# Altium PCB ir_probe.PcbDoc
Units mm, origin at the board's own origin, x right, y up, seen from the top; angles counter-clockwise.
Board outline 30 x 23.76 mm, 2 copper layers (Top Layer, Bottom Layer), stack 1.571 mm thick; 19 components, 17 nets, 72 pads, 11 vias.
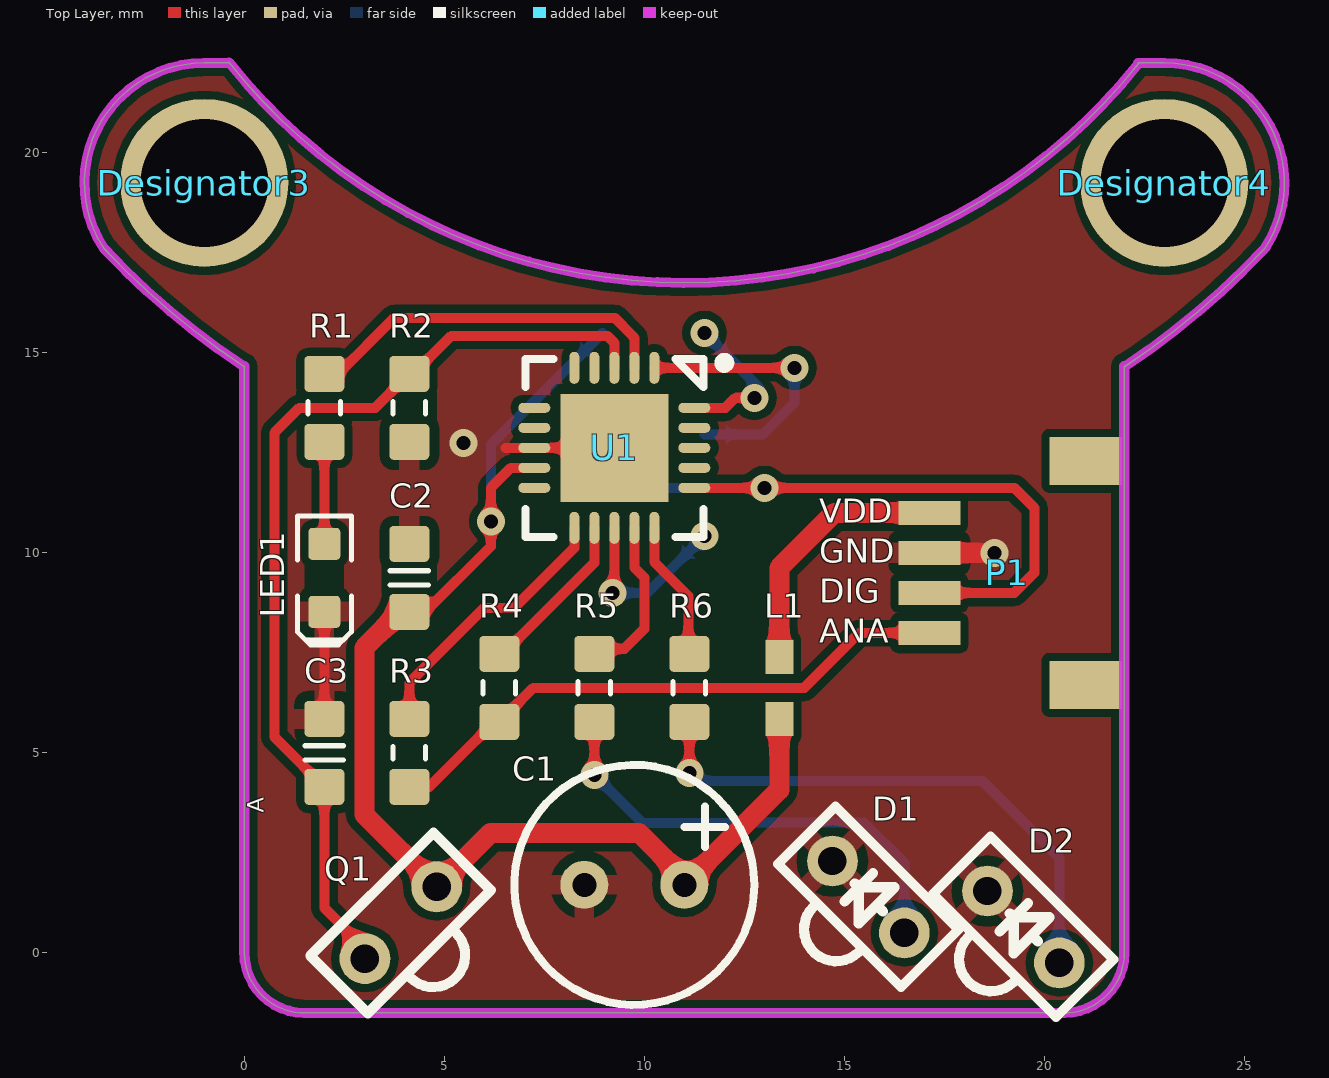
[diagram p0: Top Layer view]
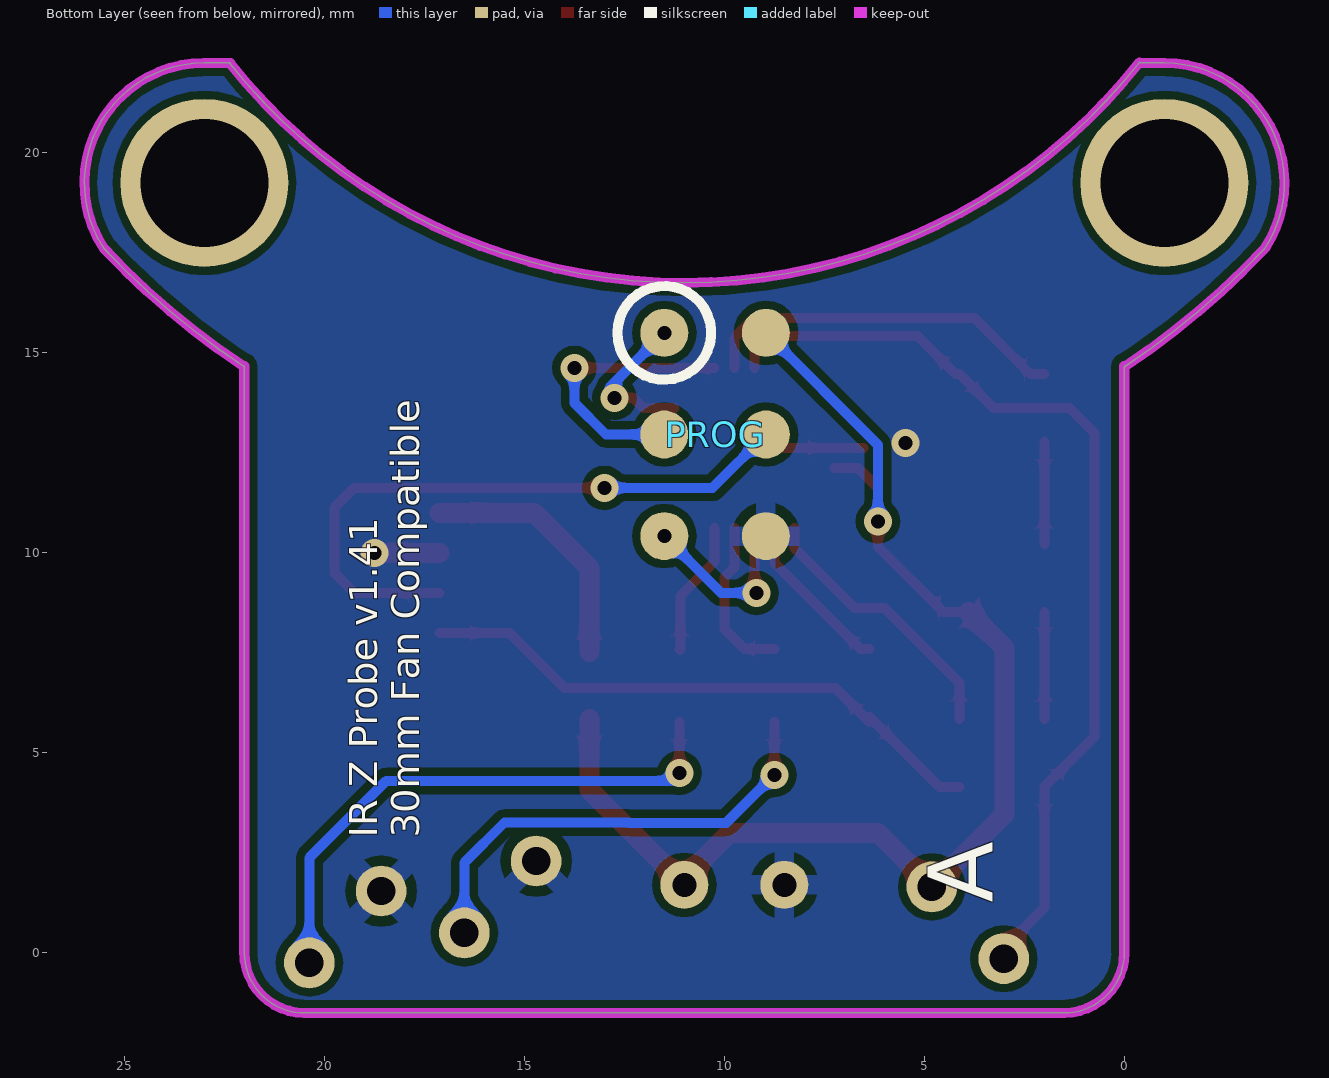
[diagram p1: Bottom Layer view, seen from below]
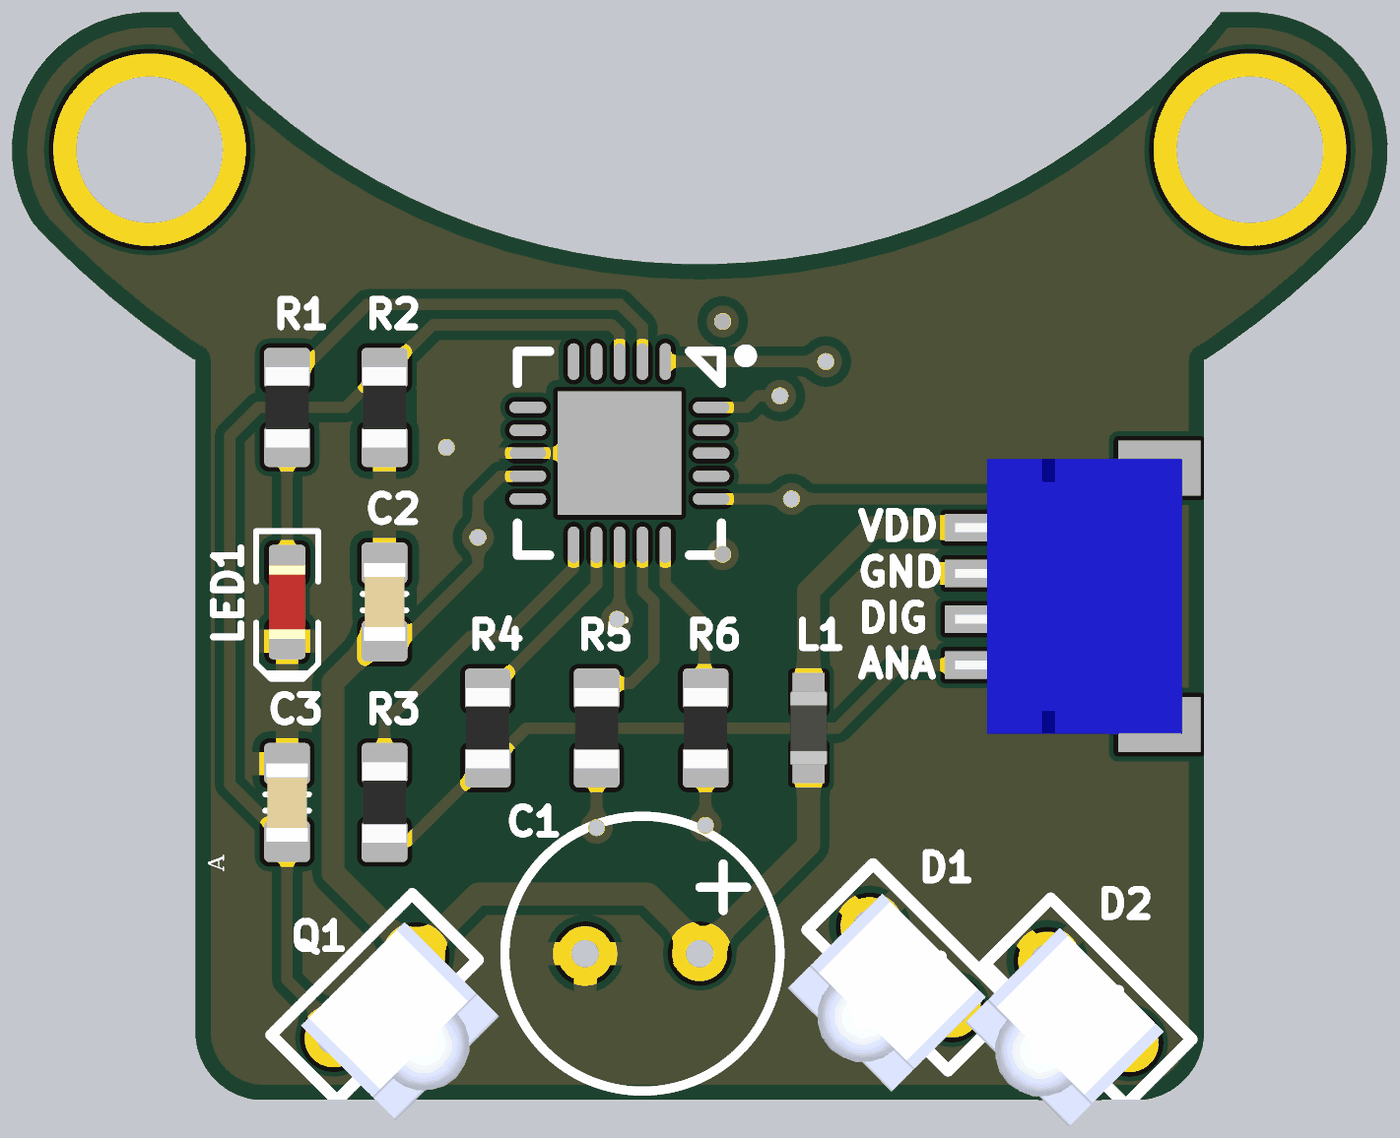
[diagram p2: 3D render of the assembled board from above, using the file's embedded part models]

## Layer stack, top to bottom
Top Solder: solder mask 0.0102, Solder Resist, Dk 3.5
Top Layer: signal copper 0.0356
Dielectric1: dielectric 1.5, FR-4, Dk 4.8
Bottom Layer: signal copper 0.0356
Bottom Solder: solder mask 0.0102, Solder Resist, Dk 3.5

## Board outline
-3.515,17.616 ccw(c11,31.25) -0.023,14.665 0,14.665 0,0 ccw(c1.5,0) 1.5,-1.5 20.5,-1.5 ccw(c20.5,0) 22,0 22,14.665 22.023,14.665 ccw(c11,31.25) 25.515,17.616 25.516,17.616 ccw(c23,19.25) 23,22.25 22.349,22.25 22.361,22.241 cw(c11,31.25) -0.379,22.263 -0.396,22.25 -1,22.25 ccw(c-1,19.25)

## Design rules (kind name [scope] priority, off if disabled: settings)
Clearance [All] p1: gap=0.2 ignorepadtopadclearanceinfootprint=FALSE except(0: Arc-Hole Track-Hole SMDPad-Hole THPad-Hole Via-Hole Fill-Hole Poly-Hole Region-Hole Text-Hole)
FabricationTestPointUsage TestPointUsage [All] p1: valid=0 allowmultiple=FALSE
FabricationTestpoint Testpoint [All] p1: side=3 testpointundercomponent=TRUE minsize=1.016 maxsize=2.54 preferedsize=1.524 minholesize=0 maxholesize=1.016 preferedholesize=0.813 testpointgrid=0.025 allowsidetop=TRUE allowsidebottom=TRUE usegrid=TRUE gridtolerance=0
HoleSize [All] p1: absolutevalues=TRUE maxlimit=4 minlimit=0.025 maxpercent=80.000 minpercent=20.000
PolygonConnect [IsVia] p1: connectstyle=Direct reliefconductorwidth=0.5 reliefentries=4 polygonreliefangle="90 Angle" airgapwidth=0.25
PolygonConnect PolygonConnect_1 [All] p2: connectstyle=Relief reliefconductorwidth=0.5 reliefentries=4 polygonreliefangle="90 Angle" airgapwidth=0.25
RoutingVias [All] p1: holewidth=0.35 width=0.6 viastyle="Through Hole" minholewidth=0.35 minwidth=0.6 maxholewidth=0.8 maxwidth=1
SilkToSolderMaskClearance SilkscreenOverComponentPads [IsPad] p1: minsilkscreentomaskgap=0.254 clearancetoexposedcopper=TRUE
SolderMaskExpansion [All] p1: expansion=0.102
Width Width_Power [(InNet('5V') OR InNet('GND') OR InNet('VCC'))] p1: maxlimit=1 minlimit=0.25 preferedwidth=0.25 minimp=50.000000 maximp=50.000000 favimp=50.000000
Width [All] p2: maxlimit=0.25 minlimit=0.2 preferedwidth=0.25 minimp=50.000000 maximp=50.000000 favimp=50.000000
26 further rules are at their usual default settings.

## Classes and differential pairs
component class z-probe: C1 C2 C3 D1 D2 L1 LED1 P1 PROG Q1 R1 R2 R3 R4 R5 R6 U1

## Components (designator, comment, footprint, x,y, rotation, side; value= is the part's Value field where it differs from the comment)
C1 "CAPE 100uF 16V THT" 6-DIA-CAP 8.5,1.7 r0 top locked
C2 "approved sub OK" CAPC1608X90N 4.125,9.375 r270 top value=100n
C3 "approved sub OK" CAPC1608X90N 2,5 r90 top value=1n
D1 "GL480E" LED-2.54SPACING 16.5,0.5 r135 top locked
D2 "GL480E" LED-2.54SPACING 20.375,-0.25 r135 top locked
Designator3 "Comment" M3-Hole -1,19.25 r0 top
Designator4 "Comment" M3-Hole 23,19.25 r270 top
L1 "7447965" SMD-0603 13.375,6.625 r270 top
LED1 "Red" LED-0603-RED 2,9.375 r270 top
P1 "JST-SH 4P" SM04B-SRSS-TB 17.125,11 r0 top
PROG "ISP" "ICSP Pads" 11.5,15.5 r180 bottom
Q1 "SFH3100F" SFH3100F-FOOTPRINT 4.81,1.65 r225 top locked
R1 "Thick Film" RESC1608X55N 2,13.625 r270 top value=330R
R2 "Thick Film" RESC1608X55N 4.125,13.625 r90 top value=6K8
R3 "Thick Film" RESC1608X55N 4.125,5 r270 top value=10K
R4 "Thick Film" RESC1608X55N 6.375,6.625 r270 top value=12K
R5 "Thick Film" RESC1608X55N 8.75,6.625 r90 top value=150R
R6 "Thick Film" RESC1608X55N 11.125,6.625 r90 top value=130R
U1 "ATtiny44A-MU" 20M1_N 9.25,12.625 r270 top

## Footprints (in the part's own frame and the unit in brackets; to place one, negate y for a bottom-side part, rotate by r counter-clockwise, add the part's x,y. Pads: shape width x height; smd on the part's side, far side on the other; paste and mask are expansions set on the pad)
6-DIA-CAP [mm]
  round 1.2 hole 0.6: 0(0,0) 1(2.5,0)
  silkscreen extent -1.75,-3 4.25,3, body extent -1.75,-3 4.25,3, height 7
20M1_N [mm] "QFN, 20-Leads, Body 4x4mm, Pitch 0.5mm, Thermal Pad 2.7x2.7mm, IPC Medium Density"
  oval 0.8x0.25 smd: 1(-2,1) 2(-2,0.5) 3(-2,0) 4(-2,-0.5) 5(-2,-1) 11(2,-1) 12(2,-0.5) 13(2,0) 14(2,0.5) 15(2,1)
  oval 0.25x0.8 smd: 6(-1,-2) 7(-0.5,-2) 8(0,-2) 9(0.5,-2) 10(1,-2) 16(1,2) 17(0.5,2) 18(0,2) 19(-0.5,2) 20(-1,2)
  rect 2.7x2.7 smd: 21(0,0)
  silkscreen extent -2.25,-2.22 2.23,2.88, body extent -2.07,-2.07 2.08,2.08, height 0.8
CAPC1608X90N [mm] "Chip Capacitor, Body 1.6x0.8mm, EIA 0603, IPC Medium Density"
  round 0.254 on Mech15: 0(0,0)
  rrect25% 0.9x1 smd: 1(-0.85,0) 2(0.85,0)
  Top Layer pour cut-out: -0.6,0.5 -0.4,0.7 0.4,0.7 0.6,0.5 0.6,-0.5 0.4,-0.7 -0.4,-0.7 -0.6,-0.5
  silkscreen extent -0.18,-0.48 0.18,0.48, body extent -0.85,-0.45 0.85,0.45, height 0.89
"ICSP Pads" [mm]
  round 1.2 smd mask+0: 0(0,0)
  round 1.2 smd: 1(2.54,0) 2(0,-2.54) 3(2.54,-2.54) 4(0,-5.08) 5(2.54,-5.08)
  silkscreen extent -1.17,-1.17 1.17,1.17
LED-2.54SPACING [mil]
  round 50 hole 28: 1(100,0) 2(0,0)
  silkscreen extent -35,-40 136,76, body extent -14,-28 112,98, height 215
LED-0603-RED [mm]
  round 0.254 on Mech15: 0(0,0)
  rrect25% 0.8x0.8 smd: A(-0.85,0) K(0.85,0)
  Top Layer pour cut-out: -0.5,0.5 0.5,0.5 0.5,-0.5 -0.5,-0.5
  silkscreen extent -1.55,-0.67 1.68,0.67, body extent -0.8,-0.4 0.8,0.4, height 0.75
M3-Hole [mm]
  round 4.2 hole 3.2: M3(0,0)
RESC1608X55N [mm] "Chip Resistor, Body 1.6x0.8mm, EIA 0603, IPC Medium Density"
  round 0.254 on Mech15: 0(0,0)
  rrect25% 0.9x1 smd: 1(-0.85,0) 2(0.85,0)
  Top Layer pour cut-out: -0.6,0.5 -0.4,0.7 0.4,0.7 0.6,0.5 0.6,-0.5 0.4,-0.7 -0.4,-0.7 -0.6,-0.5
  silkscreen extent -0.15,-0.41 0.15,0.41, body extent -0.87,-0.47 0.88,0.48, height 0.54
SFH3100F-FOOTPRINT [mil]
  round 50 hole 28: 1(0,0) 2(100,0)
  silkscreen extent -35,-40 136,76, body extent -14,-28 112,98, height 215
SM04B-SRSS-TB [mm]
  rect 1.55x0.6 smd: 0(0,0) 1(0,-1) 2(0,-2) 3(0,-3)
  rect 1.8x1.2 smd: ""(3.9,-4.3) ""(3.9,1.3)
  body extent -0.55,-4.5 4.4,1.5, height 2.96
SMD-0603 [mm] "Chip Inductor, 2-Leads, Body 1.6x0.8mm"
  rect 0.85x0.7 smd: 1(-0.775,0) 2(0.775,0)
  body extent -0.8,-0.4 0.8,0.4, height 0.95

## Part data
C1: Supplier Part Number 1=399-6648-1-ND, Supplier 1=Digi-Key
C2: library part CAPC_100n_0603_X7R_50V_10%, "Capacitor SMD Cer 100nF 10% 50V X7R 0603", Manufacturer 1="AVX Corporation", Manufacturer 2="TDK Corporation", Manufacturer Part Number 1=06035C104KAT2A, Manufacturer Part Number 2=C1608X7R1H104K, Package / Case="0603 (1608 Metric)", Ratings="50V; X7R", Supplier Part Number 1=478-5052-1-ND, Tolerance=±10%, ComponentLink1Description=http://www.avx.com/docs/Catalogs/cx7r.pdf, ComponentLink1URL=http://www.avx.com/docs/Catalogs/cx7r.pdf, ComponentLink2Description=http://product.tdk.com/capacitor/mlcc/en/documents/mlcc_commercial_general_en.pdf, ComponentLink2URL=http://product.tdk.com/capacitor/mlcc/en/documents/mlcc_commercial_general_en.pdf, Material=ceramic, SCDType=spec, Supplier 1=Digi-Key, Supplier 2=Digi-Key, Supplier Part Number 2=445-1314-1-ND
C3: library part CAPC_1n_0603_X7R_100V_10%, "Capacitor SMD Cer 1nF 10% 100V X7R 0603", Manufacturer 1="Murata Electronics North America", Manufacturer Part Number 1=GCM188R72A102KA37D, Operating Temperature="-55°C ~ 125°C", Package / Case="0603 (1608 metric)", Ratings="100V; X7R", Supplier Part Number 1=490-4780-1-ND, Tolerance=±10%, ComponentLink1Description=http://search.murata.co.jp/Ceramy/image/img/PDF/ENG/GCM188R72A102KA37.pdf, ComponentLink1URL=http://search.murata.co.jp/Ceramy/image/img/PDF/ENG/GCM188R72A102KA37.pdf, Material=ceramic, SCDType=spec, Size / Dimension="0.063\" L x 0.031\" W (1.60mm x 0.80mm)", Supplier 1=Digi-Key, Thickness (Max)="0.035\" (0.90mm)"
D1 D2: Supplier Part Number 1=425-1940-5-ND, Supplier 1=Digi-Key
L1: "SMD-Multilayer Inductor WE-MI, L = 1.00 µH", Inductance="1.00 µH", Supplier Part Number 1=445-3163-2-ND, ComponentLink1Description="Manufacturer URL", ComponentLink1URL=http://www.we-online.com, ComponentLink2Description=Datasheet, ComponentLink2URL=http://www.we-online.de/katalog/media/pdf/7447965.pdf, DatasheetVersion="ver 5, Oct-2004", PackageDescription="Chip Inductor, 2-Leads, Body 1.6 x 0.8 mm", PackageReference=SMD-0603, PackageVersion=2009, Supplier 1=Digi-Key
LED1: library part LED_SMD_Red_0603_220mcd, "LED 0603 SMD Hyper Red 630nm 220mcd 20mA", Manufacturer 1="Kingbright Company LLC", Manufacturer Part Number 1=APT1608SURCK, Package / Case="0603 (1608 metric)", Ratings="220 mcd; 630 nm", Supplier Part Number 1=754-1123-1-ND, Voltage - Forward (Vf) @ 10mA=1.9V, Voltage - Forward (Vf) Typ=1.95V, ComponentLink1Description=http://www.us.kingbright.com/images/catalog/SPEC/APT1608SURCK.pdf, ComponentLink1URL=http://www.us.kingbright.com/images/catalog/SPEC/APT1608SURCK.pdf, Material="AlGaInP on GaAs", SCDType=source, Supplier 1=Digi-Key
P1: library part SM04B-SRSS-TB, Supplier Part Number 1=455-1804-1-ND, Supplier 1=Digi-Key
PROG: library part "ISP Header"
Q1: Supplier Part Number 1=475-1445-ND, Supplier 1=Digi-Key
R1: library part RES_330R_0603_5%, "Resistor SMD chip 330 Ohm 0.1W 5% 0603", Manufacturer 1="Vishay Dale", Manufacturer 2=Yageo, Manufacturer Part Number 1=CRCW0603330RJNEA, Manufacturer Part Number 2=RC0603JR-07330RL, Package / Case="0603 (1608 metric)", Ratings="1/10 W", Supplier Part Number 1=541-330GCT-ND, Tolerance=±5%, ComponentLink1Description=http://www.vishay.com/doc?20035, ComponentLink1URL=http://www.vishay.com/doc?20035, ComponentLink2Description=http://www.yageo.com/documents/recent/PYu-RC0603_51_RoHS_L_4.pdf, ComponentLink2URL=http://www.yageo.com/documents/recent/PYu-RC0603_51_RoHS_L_4.pdf, Material="Thick Film", SCDType=spec, Supplier=http://au.rs-online.com/web/p/surface-mount-fixed-resistors/6790226/, Supplier 1=Digi-Key, Supplier 2=Digi-Key, Supplier Part Number 2=311-330GRCT-ND
R2 R5 R6: library part RES_2K2_0603_5%, "Resistor SMD chip 2.2k Ohm 0.1W 5% 0603", Manufacturer 1=Yageo, Manufacturer 2="Samsung Electro-Mechanics America, Inc", Manufacturer 3="Stackpole Electronics Inc", Manufacturer 4="Rohm Semiconductor", Manufacturer 5="Panasonic Electronic Components", Manufacturer Part Number 1=RC0603JR-072K2L, Manufacturer Part Number 2=RC1608J222CS, Manufacturer Part Number 3=RMCF0603JT2K20, Manufacturer Part Number 4=MCR03ERTJ222, Manufacturer Part Number 5=ERJ-3GEYJ222V, Package / Case="0603 (1608 metric)", Ratings="1/10 W", Supplier Part Number 1=311-2.2KGRDKR-ND, Temperature Coefficient=±100ppm/°C, Tolerance=±5%, ComponentLink1Description=http://www.yageo.com/documents/recent/PYu-RC0603_51_RoHS_L_4.pdf, ComponentLink1URL=http://www.yageo.com/documents/recent/PYu-RC0603_51_RoHS_L_4.pdf, ComponentLink2Description=http://www.samsungsem.com/servlet/FileDownload?filename=productcatalog/pdf/Chip_Resistor.pdf, ComponentLink2URL=http://www.samsungsem.com/servlet/FileDownload?filename=productcatalog/pdf/Chip_Resistor.pdf, ComponentLink3Description=http://www.seielect.com/Catalog/SEI-RMCF_RMCP.pdf, ComponentLink3URL=http://www.seielect.com/Catalog/SEI-RMCF_RMCP.pdf, ComponentLink4Description=http://rohmfs.rohm.com/en/products/databook/datasheet/passive/resistor/chip_resistor/mcr_g.pdf, ComponentLink4URL=http://rohmfs.rohm.com/en/products/databook/datasheet/passive/resistor/chip_resistor/mcr_g.pdf, ComponentLink5Description=http://industrial.panasonic.com/www-cgi/jvcr13pz.cgi?E+PZ+3+AOA0001+ERJ3GEYJ222V+7+WW, ComponentLink5URL=http://industrial.panasonic.com/www-cgi/jvcr13pz.cgi?E+PZ+3+AOA0001+ERJ3GEYJ222V+7+WW, Material="Thick Film", RoHS 1="RoHS Compliant", RoHS 2="RoHS Compliant", RoHS 3="RoHS Compliant", RoHS 4="RoHS Compliant", RoHS 5="RoHS Compliant", SCDType=spec, Supplier 1=Digi-Key, Supplier 2=Digi-Key, Supplier 3=Digi-Key, Supplier 4=Digi-Key, Supplier 5=Digi-Key, Supplier Part Number 2=1276-5070-6-ND, Supplier Part Number 3=RMCF0603JT2K20DKR-ND, Supplier Part Number 4=RHM2.2KCGDKR-ND, Supplier Part Number 5=P2.2KGDKR-ND
  R2: Supplier=http://au.rs-online.com/web/p/surface-mount-fixed-resistors/8102303/
  R5: Supplier=http://au.rs-online.com/web/p/surface-mount-fixed-resistors/6789784/
  R6: Supplier=http://au.rs-online.com/web/p/surface-mount-fixed-resistors/8102129/
R3 R4: library part RES_10K_0603_1%, "Resistor SMD chip 10k Ohm 0.1W 1% 0603", Manufacturer 1=Yageo, Manufacturer Part Number 1=RC0603FR-0710KL, Package / Case="0603 (1608 Metric)", Ratings=1/10W, Supplier Part Number 1=311-10.0KHRCT-ND, Tolerance=±1%, SCDType=spec, Supplier 1=Digi-Key
U1: "8-bit AVR Microcontroller,  20MHz, 1.8-5.5V, 4KB Flash, 256 Bytes EEPROM, 256 Bytes SRAM, 20-pin MLF, Industrial Grade (-40°C to 85°C), Pb-Free", Supplier Part Number 1=ATTINY44A-MU-ND, Code_JEDEC=MO-220WGGD-5, ComponentLink1Description="Manufacturer URL", ComponentLink1URL=http://www.atmel.com/, ComponentLink2Description="ATtiny24A/44A/84A Datasheet", ComponentLink2URL=http://www.atmel.com/dyn/resources/prod_documents/doc8183.pdf, ComponentLink3Description="ATtiny24A/44A/84A Summary", ComponentLink3URL=http://www.atmel.com/dyn/resources/prod_documents/8183S.pdf, DatasheetVersion="revD, Apr-2011", PackageDescription="20-pad, 4 x 4 x 0.8 mm Body, Lead Pitch 0.50 mm, 2.6 mm Exposed Pad, Micro Lead Frame Package (MLF)", PackageReference=20M1, PackageVersion="revA, Oct-2004", Supplier 1=Digi-Key

## Via types
v1: diameter 0.7, hole 0.35, Top Layer to Bottom Layer, tented both sides, 9 vias
v2: diameter 0.7, hole 0.35, Top Layer to Bottom Layer, tented top, 2 vias

## Nets (pads, with @x,y where several pads share a name; then routed paths per layer and width w, separated by ;. In a path a pad name is that pad's centre, name@x,y a point inside that pad or via, vN(x,y) a via of type N, cw(c..) or ccw(c..) an arc to the next point about the centre after c; other vN are vias at no path point)
5V: C1.1 C2.2 L1.2 PROG.1 Q1.1 U1.9 | length 32.5
  Top Layer w0.25: C2.2@3.9,8.525 C2.2 4.525,8.525 6.161,10.161 v1(6.161,10.786) 6.161,11.625 6.661,12.125 U1.9 ; C1.1@10.55,1.5 10.9,1.85 C1.1@10.9,1.966 ; L1.2 L1.2@13.375,5.975
  Top Layer w0.5: C2.2@3.9,8.525 3,7.625 3,3.46 Q1.1 6.16,3 9.866,3 C1.1@10.9,1.966 ; C1.1 13.375,4.075 L1.2
  Bottom Layer w0.25: v1(6.161,10.786) 6.161,12.701 PROG.1
DIODE1: R5.2 U1.14 | length 4.1
  Top Layer w0.25: R5.2@8.75,7.6 9.5,7.6 10,8.1 10,9.384 9.75,9.634 U1.14
DIODE2: R6.2 U1.15 | length 3.4
  Top Layer w0.25: U1.15 10.25,9.77 11.1,8.92 11.1,7.575 R6.2@11.125,7.6
GND: C1.0 C2.1 C3.2 D1.1 D2.1 LED1.K P1.1 PROG.5 R2.1 U1.8 U1.21 | length 7
  Top Layer w0.25: C3.2 LED1.K ; 6.525,12.625 U1.8 U1.21
  Top Layer w0.5: P1.1 v1(18.75,10)
  other v1: 5.475,12.75
INDICATOR: R1.1 U1.2 | length 9.3
  Top Layer w0.25: R1.1 2.35,14.475 3.75,15.875 9.261,15.875 9.7,15.436 9.7,15.425 9.75,15.375 U1.2
MISO: PROG.0 U1.20 | length 3.8
  Top Layer w0.25: U1.20 12.025,13.625 12.275,13.875 v1(12.75,13.875)
  Bottom Layer w0.25: v2(11.5,15.5) 12.875,14.125 12.875,14 v1(12.75,13.875)
MOSI: P1.2 PROG.3 U1.16 | length 17.8
  Top Layer w0.25: U1.16 19.25,11.625 19.75,11.125 19.75,9.5 19.25,9 P1.2
  Bottom Layer w0.25: PROG.3 10.295,11.625 v1(13,11.625)
NetD1_2: D1.2 R5.1 | length 11.7
  Top Layer w0.25: v1(8.75,4.45) R5.1
  Bottom Layer w0.25: v1(8.75,4.45) 9.95,3.25 12.384,3.25 12.39,3.256 15.494,3.256 16.5,2.25 D1.2
NetD2_2: D2.2 R6.1 | length 14
  Top Layer w0.25: v1(11.125,4.5) R6.1
  Bottom Layer w0.25: v1(11.125,4.5) 11.325,4.3 18.45,4.3 20.375,2.375 D2.2
NetLED1_A: LED1.A R1.2 | length 2.5
  Top Layer w0.25: LED1.A R1.2
RESET: PROG.4 U1.13 | length 4.5
  Top Layer w0.25: v1@9.25,9 U1.13
  Bottom Layer w0.25: v1(9.2,9) 10.08,9 v2(11.5,10.42)
SCK: PROG.2 U1.1 | length 7
  Top Layer w0.25: U1.1 v1(13.75,14.625)
  Bottom Layer w0.25: PROG.2 12.96,12.96 13.75,13.75 v1(13.75,14.625)
SIG_A: P1.3 R3.2 R4.2 | length 14.6
  Top Layer w0.25: R3.2 4.625,4.15 R4.2@6.375,5.9 ; R4.2 7.225,6.625 14,6.625 15.375,8 P1.3
SIG_A1: R3.1 U1.11 | length 6.9
  Top Layer w0.25: R3.1 4.125,6.75 6,8.625 6.75,8.625 8.25,10.125 U1.11
SIG_A2: R4.1 U1.12 | length 4.1
  Top Layer w0.25: R4.1@6.375,7.6 6.6,7.6 8.75,9.75 U1.12
TRANSISTOR: C3.1 Q1.2 R2.2 U1.3 | length 24.3
  Top Layer w0.25: Q1.2 3.014,0.111 2,1.125 C3.1 0.75,5.4 0.75,13 1.375,13.625 3.275,13.625 R2.2 4.225,14.475 5.175,15.425 9.075,15.425 9.25,15.25 U1.3
VCC: L1.1 P1.0 | length 6.4
  Top Layer w0.5: L1.1@13.375,7.525 13.375,9.625 14.75,11 P1.0
pads on no net: C2.0 C3.0 Designator3.M3 Designator4.M3 LED1.0 P1. R1.0 R2.0 R3.0 R4.0 R5.0 R6.0 U1.4 U1.5 U1.6 U1.7 U1.10 U1.17 U1.18 U1.19

## Polygon pours and split planes (outlines as drawn)
GND on Bottom Layer "GND" (solid, remove dead copper, pour order 0): -4,22.5 -4,-2.5 26,-2.5 26,22.5
GND on Top Layer "GND" (solid, remove dead copper, pour order 2): -4,22.5 -4,-2.5 26,-2.5 26,22.5

## Keep-outs
Keep-Out Layer:
  lines w0.25: -3.516,17.616 cw(c-1,19.25) -1,22.25 ; -3.515,17.616 ccw(c11,31.25) -0.023,14.665 ; -0.379,22.263 ccw(c11,31.25) 22.361,22.241 ; 22.023,14.665 ccw(c11,31.25) 25.515,17.616 ccw(c23,19.25) 23,22.25
  lines w0.254: -1,22.25 -0.396,22.25 ; 0,14.665 0,0 ccw(c1.5,0) 1.5,-1.5 20.5,-1.5 ccw(c20.5,0) 22,0 22,14.665 ; 22.349,22.25 23,22.25

## Silkscreen, mask and mechanical layers (free items; w line width, h text height)
Top Overlay:
  lines w0.2: 10.775,14.85 11.475,14.15
  text "VDD" at 14.375,10.75 h0.6
  text "GND" at 14.375,9.75 h0.6
  text "DIG" at 14.375,8.75 h0.6
  text "ANA" at 14.375,7.75 h0.6
  text "A" at 0.625,3.5 h0.7 r90
Bottom Overlay:
  text "IR Z Probe v1.41 / 30mm Fan Compatible" at 17.625,2.875 h0.7 r270
  text "A" at 2.75,1.25 h2.8 r270
Mechanical 2:
  lines w0.013: -144.074,-93.324 -141.066,-93.324 -139.129,-87.836 -142.137,-87.836 -144.074,-93.324 ; -138.263,-93.324 -135.256,-93.324 -133.319,-87.836 -136.327,-87.836 -138.263,-93.324 ; -132.453,-93.324 -129.446,-93.324 -127.509,-87.836 -130.516,-87.836 -132.453,-93.324 ; -126.643,-93.324 -123.635,-93.324 -121.699,-87.836 -124.706,-87.836 -126.643,-93.324 ; -121.026,-93.324 -118.018,-93.324 -116.081,-87.836 -119.089,-87.836 -121.026,-93.324 ; -115.215,-93.324 -112.208,-93.324 -110.271,-87.836 -113.279,-87.836 -115.215,-93.324 ; -109.405,-93.324 -106.397,-93.324 -104.461,-87.836 -107.468,-87.836 -109.405,-93.324
Mechanical 4:
  circle w0.25: c11,31.25 r14.5
  lines w0.254: -4,19 -4,19.375 ; 26,19.2 26,19.25
  text "X" at 29.9,-1.4 h1.52 r180
Mechanical 7:
  lines w0.2: 9.4,-1.8 10.5,-2.9 11.5,-2.9 12.6,-1.8
  text "Nozzle" at 3.8,-3 h1
  text "Distance from board edge to nozzle (X)  / should be 1.00 - 2.00mm /  / Vertical distance from mounting holes / to nozzle tip should be 20.75 + X / (i.e. 21.75 to 22.75)" at -9.2,-17.6 h1
Mechanical 16:
  drawing of 1875 lines, arcs and shapes, not listed
  text "1" at -102.129,101.361 h0.6
  text "2" at -29.485,101.361 h0.6
  text "3" at 43.667,101.361 h0.6
  text "4" at 116.565,101.361 h0.6
  text "A" at -136.47,78.349 h0.6
  text "A" at 150.55,78.349 h0.6
  text "B" at -136.47,30.292 h0.6
  text "B" at 150.55,30.292 h0.6
  text "C" at -136.47,-18.222 h0.6
  text "C" at 150.55,-18.222 h0.6
  text "ENGINEER:" at 35.615,-55.23 h0.6
  text "TITLE:" at 73.715,-55.23 h0.6
  text "PCB DESIGNER:" at 35.615,-62.723 h0.6
  text "D" at -136.47,-66.228 h0.6
  text "D" at 150.55,-66.228 h0.6
  text "DATE:" at 35.615,-70.47 h0.6
  text "PART NO.:" at 73.715,-70.47 h0.6
  text "REV:" at 127.055,-70.47 h0.6
  text "Altium Limited" at 2.595,-73.01 h0.6
  text ".PRINT_DATE" at 36.885,-73.518 h0.6
  text "12a Rodborough Rd" at 2.595,-75.55 h0.6
  text "Frenchs Forest" at 2.595,-78.09 h0.6
  text "FILE NAME:" at 35.615,-78.09 h0.6
  text "DWG NO:" at 73.715,-78.09 h0.6
  text "SCALE:" at 127.055,-78.09 h0.6
  text "NSW 2086" at 2.595,-80.63 h0.6
  text ".PCB_FILE_NAME_NO_PATH" at 36.885,-81.138 h0.6
  text "1" at -102.129,-86.599 h0.6
  text "2" at -29.485,-86.599 h0.6
  text "3" at 43.667,-86.599 h0.6
  text "4" at 116.565,-86.599 h0.6

## Dimensions
-3.5,31.25 to 25.5,31.25 on Mechanical 4
23,22.25 to 20.5,-1.5 on Mechanical 4
0,14.665 to 22,14.665 on Mechanical 4
-1,19.25 to 23,19.25 on Mechanical 4
11.9,-2.9 to 1.5,-1.5 on Mechanical 4
-1,19.25 to 1.5,-1.5 on Mechanical 4
-4,19.375 to 26,19.2 on Mechanical 4